# Altium PCB PA-03225-V0.4-4.PcbDoc (part 2 of 4)
Units mm, origin at the board's own origin, x right, y up, seen from the top; angles counter-clockwise.
Board outline 43 x 41 mm, 6 copper layers (Top Layer, GND, L3, L4, PWR, Bottom Layer); 103 components, 178 nets, 551 pads, 290 vias.
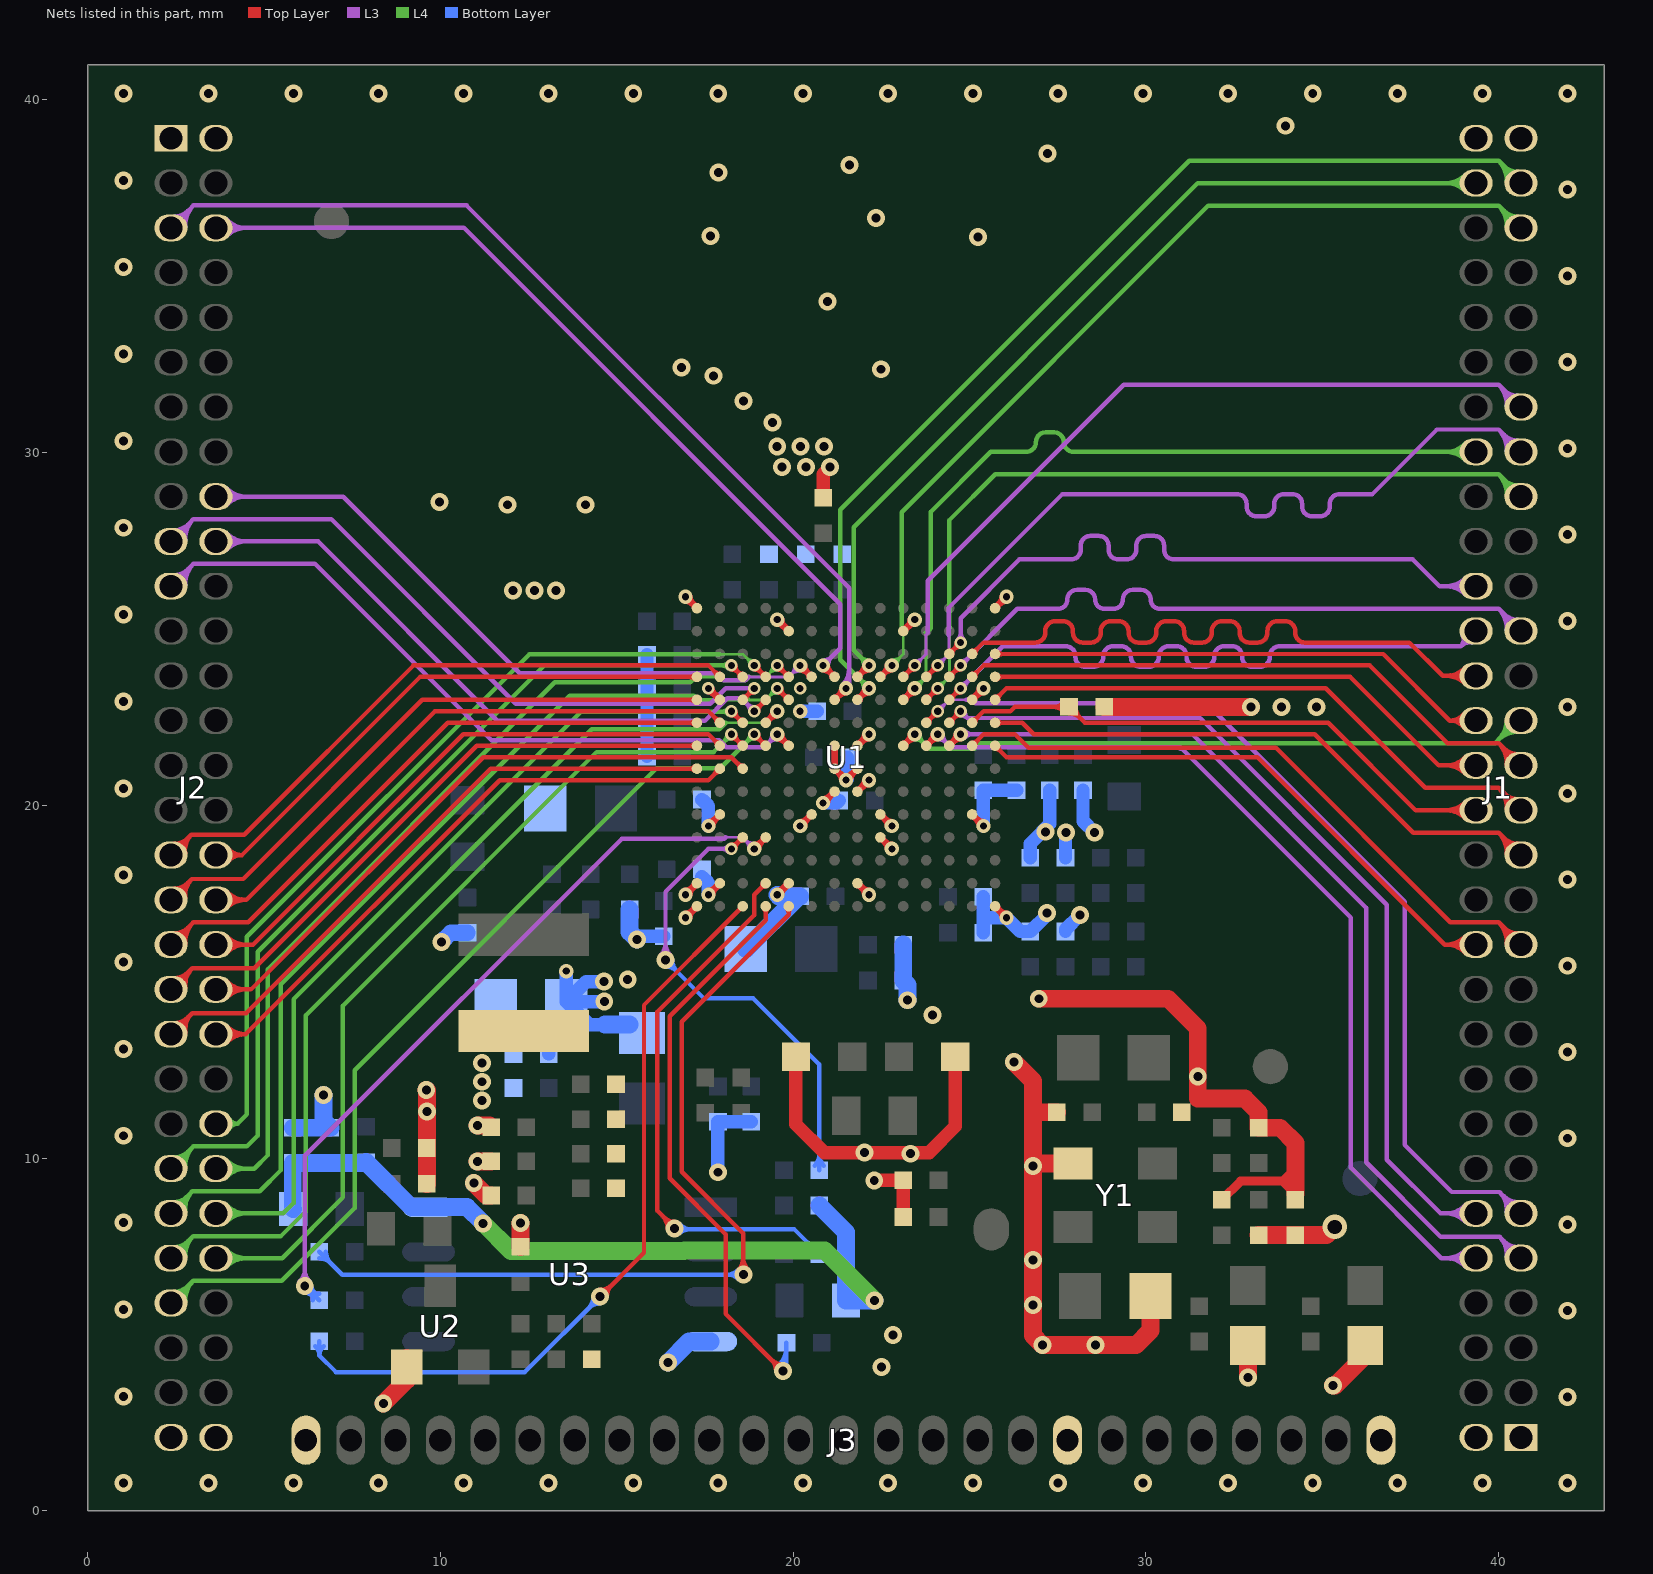
[diagram p6: the nets of this part, all layers, seen from the top]

## Via types
v1: diameter 0.508, hole 0.254, Top Layer to Bottom Layer, tented both sides, 169 vias
v2: diameter 0.406, hole 0.203, Top Layer to Bottom Layer, tented both sides, 78 vias
v3: diameter 0.356, hole 0.203, Top Layer to Bottom Layer, tented both sides, 42 vias
v4: diameter 0.7, hole 0.4, Top Layer to Bottom Layer, tented both sides, 1 vias

## Nets (pads, with @x,y where several pads share a name; then routed paths per layer and width w, separated by ;. In a path a pad name is that pad's centre, name@x,y a point inside that pad or via, vN(x,y) a via of type N, cw(c..) or ccw(c..) an arc to the next point about the centre after c; other vN are vias at no path point) (continued)
C12_RMII1-CRS_DV: J1.40 U1.C12 | length 21.6
  Top Layer w0.127: U1.C12@24.425,24.294 v3(24.75,24.619) ; U1.C12@24.425,24.38 ccw(c24.425,24.589) 24.573,24.441 ccw(c24.72,24.294) U1.C12@24.512,24.294 ; v3@24.636,24.619 cw(c24.36,24.619) 24.555,24.423 cw(c24.75,24.228) v3@24.75,24.504
  L3 w0.127: v3@24.669,24.699 ccw(c24.474,24.895) 24.75,24.895 ccw(c25.026,24.895) v3@24.831,24.699 ; v3(24.75,24.619) 24.75,25.309 26.416,26.975 27.88,26.975 ccw(c27.88,27.25) 28.156,27.25 28.156,27.366 cw(c28.431,27.366) 28.431,27.642 28.668,27.642 cw(c28.668,27.366) 28.943,27.366 28.943,27.25 ccw(c29.219,27.25) 29.219,26.975 29.455,26.975 ccw(c29.455,27.25) 29.731,27.25 29.731,27.366 cw(c30.006,27.366) 30.006,27.642 30.243,27.642 cw(c30.243,27.366) 30.518,27.366 30.518,27.25 ccw(c30.794,27.25) 30.794,26.975 37.567,26.975 38.326,26.215 J1.40@39.365,26.215 ; J1.40@39.052,25.99 ccw(c38.51,25.448) 38.51,26.215 ccw(c38.51,26.982) J1.40@39.052,26.44 ; J1.40@39.141,26.08 ccw(c38.816,25.755) 38.816,26.215 ccw(c38.816,26.675) J1.40@39.141,26.35
C13_ENET1_RXER: J1.36 U1.C13 | length 20.7
  Top Layer w0.127: U1.C13@25.075,24.294 25.4,24.619 26.754,24.619 26.872,24.619 ccw(c26.872,24.894) 27.147,24.894 27.147,24.947 cw(c27.423,24.947) 27.423,25.223 27.659,25.223 cw(c27.659,24.947) 27.935,24.947 27.935,24.894 ccw(c28.21,24.894) 28.21,24.619 28.447,24.619 ccw(c28.447,24.894) 28.722,24.894 28.722,24.947 cw(c28.998,24.947) 28.998,25.223 29.234,25.223 cw(c29.234,24.947) 29.51,24.947 29.51,24.894 ccw(c29.785,24.894) 29.785,24.619 30.021,24.619 ccw(c30.021,24.894) 30.297,24.894 30.297,24.947 cw(c30.572,24.947) 30.572,25.223 30.809,25.223 cw(c30.809,24.947) 31.084,24.947 31.084,24.894 ccw(c31.36,24.894) 31.36,24.619 31.596,24.619 ccw(c31.596,24.894) 31.872,24.894 31.872,24.947 cw(c32.147,24.947) 32.147,25.223 32.384,25.223 cw(c32.384,24.947) 32.659,24.947 32.659,24.894 ccw(c32.935,24.894) 32.935,24.619 33.171,24.619 ccw(c33.171,24.894) 33.447,24.894 33.447,24.947 cw(c33.722,24.947) 33.722,25.223 33.958,25.223 cw(c33.958,24.947) 34.234,24.947 34.234,24.894 ccw(c34.509,24.894) 34.509,24.619 36.703,24.619 37.471,24.619 38.415,23.675 J1.36@39.365,23.675 ; U1.C13@25.075,24.38 ccw(c25.075,24.589) 25.223,24.441 ccw(c25.37,24.294) U1.C13@25.162,24.294 ; J1.36@39.052,23.45 ccw(c38.51,22.908) 38.51,23.675 ccw(c38.51,24.442) J1.36@39.052,23.9 ; J1.36@39.141,23.54 ccw(c38.816,23.215) 38.816,23.675 ccw(c38.816,24.135) J1.36@39.141,23.81
C14_ETH1-MDC: J1.34 U1.C14 | length 16.3
  Top Layer w0.127: U1.C14@25.725,24.294 36.729,24.294 38.618,22.405 ; U1.C14@25.786,24.232 cw(c25.934,24.085) 25.934,24.294 cw(c25.934,24.502) U1.C14@25.786,24.355 ; J1.34@39.028,22.207 ccw(c38.618,21.881) 38.618,22.405 ; J1.34@39.028,22.603 cw(c38.618,22.929) 38.618,22.405 ; J1.34@39.127,22.286 ccw(c38.881,22.091) 38.881,22.405 ccw(c38.881,22.719) J1.34@39.127,22.524 ; J1.34@39.365,22.405 38.618,22.405
D1: J2.34 U1.D1 | length 17.5
  Top Layer w0.127: J2.34@3.635,18.595 4.377,18.595 ; J2.34@3.874,18.477 cw(c4.116,18.287) 4.116,18.595 cw(c4.116,18.902) J2.34@3.874,18.712 ; J2.34@3.974,18.399 cw(c4.377,18.083) 4.377,18.595 ; J2.34@3.974,18.791 ccw(c4.377,19.107) 4.377,18.595 ; U1.D1@17.214,23.582 ccw(c17.066,23.435) 17.066,23.644 ccw(c17.066,23.852) U1.D1@17.214,23.705 ; U1.D1@17.275,23.644 9.426,23.644 4.377,18.595
D2: J2.33 U1.D2 | length 19.7
  Top Layer w0.127: J2.33@2.365,18.595 2.941,19.171 ; J2.33@2.454,18.912 ccw(c2.454,19.464) 2.844,19.074 ; J2.33@2.642,18.623 cw(c3.069,18.688) 2.764,18.993 ; J2.33@2.768,18.642 cw(c3.377,18.735) 2.941,19.171 ; U1.D2@17.839,23.644 ccw(c17.63,23.644) 17.777,23.791 ccw(c17.925,23.939) U1.D2@17.925,23.73 ; U1.D2@17.925,23.644 17.6,23.969 9.237,23.969 4.439,19.171 2.941,19.171
D3: J2.47 U1.D3 | length 28.1
  Top Layer w0.127: v3@18.25,23.854 cw(c18.25,23.578) 18.445,23.773 cw(c18.64,23.969) v3@18.364,23.969 ; v3(18.25,23.969) U1.D3@18.575,23.644 ; U1.D3@18.489,23.644 ccw(c18.28,23.644) 18.427,23.791 ccw(c18.575,23.939) U1.D3@18.575,23.73
  L4 w0.127: J2.47@2.365,9.705 2.992,10.332 ; J2.47@2.454,10.022 ccw(c2.454,10.574) 2.844,10.184 ; J2.47@2.644,9.72 cw(c3.173,9.762) 2.798,10.137 ; J2.47@2.77,9.73 cw(c3.533,9.791) 2.992,10.332 ; v3@18.169,23.888 ccw(c17.974,23.693) 17.974,23.969 ccw(c17.974,24.245) v3@18.169,24.049 ; v3(18.25,23.969) 12.942,23.969 4.826,15.853 4.826,10.642 4.516,10.332 2.992,10.332
D4: J2.46 U1.D4 | length 26.2
  Top Layer w0.127: v3@18.9,23.854 cw(c18.9,23.578) 19.095,23.773 cw(c19.29,23.969) v3@19.014,23.969 ; v3(18.9,23.969) U1.D4@19.225,23.644 ; U1.D4@19.139,23.644 ccw(c18.93,23.644) 19.077,23.791 ccw(c19.225,23.939) U1.D4@19.225,23.73
  L4 w0.076: 17.907,24.286 18.582,24.286 v3(18.9,23.969) ; v3@18.76,23.969 ccw(c18.423,23.969) 18.662,24.207 ccw(c18.9,24.446) v3@18.9,24.108
  L4 w0.127: J2.46@3.635,10.975 4.25,10.975 ; J2.46@4.005,10.827 cw(c4.25,10.698) 4.25,10.975 ; J2.46@4.005,11.122 ccw(c4.25,11.251) 4.25,10.975 ; 17.907,24.286 12.525,24.286 4.516,16.277 4.516,11.241 4.25,10.975
D5: J2.48 U1.D5 | length 28.7
  Top Layer w0.127: v3@19.55,23.854 cw(c19.55,23.578) 19.745,23.773 cw(c19.94,23.969) v3@19.664,23.969 ; v3(19.55,23.969) U1.D5@19.875,23.644 ; U1.D5@19.789,23.644 ccw(c19.58,23.644) 19.727,23.791 ccw(c19.875,23.939) U1.D5@19.875,23.73
  L4 w0.076: 18.74,23.651 19.232,23.651 v3(19.55,23.969) ; v3@19.41,23.969 cw(c19.073,23.969) 19.312,23.73 cw(c19.55,23.492) v3@19.55,23.829
  L4 w0.127: J2.48@3.635,9.705 4.726,9.705 5.111,10.09 5.111,15.359 13.247,23.495 17.08,23.495 17.247,23.662 17.926,23.662 18.034,23.554 18.65,23.554 18.74,23.644 ; J2.48@3.859,9.57 cw(c4.184,9.245) 4.184,9.705 cw(c4.184,10.165) J2.48@3.859,9.839 ; J2.48@3.948,9.48 cw(c4.49,8.938) 4.49,9.705 cw(c4.49,10.471) J2.48@3.948,9.929
D6_SAI3_TX_BLCK: J2.18 U1.D6 | length 24.1
  Top Layer w0.127: v2@20.189,23.829 cw(c20.164,23.5) U1.D6@20.45,23.665 ; v2@20.2,23.829 cw(c20.2,23.492) 20.438,23.73 cw(c20.677,23.969) v2@20.34,23.969 ; v2(20.2,23.969) U1.D6@20.525,23.644 ; v2@20.23,23.832 cw(c20.263,23.682) 20.396,23.759 ; v2@20.336,23.939 ccw(c20.487,23.906) 20.41,23.773 ; v2@20.339,23.979 ccw(c20.668,24.004) U1.D6@20.503,23.718 ; U1.D6@20.439,23.644 ccw(c20.23,23.644) 20.377,23.791 ccw(c20.525,23.939) U1.D6@20.525,23.73
  L3 w0.076: 18.74,23.644 19.875,23.644 v2(20.2,23.969) ; v2@20.035,23.969 cw(c19.636,23.969) 19.918,23.687 cw(c20.2,23.405) v2@20.2,23.804 ; v2@20.111,23.969 cw(c19.896,23.969) 20.048,23.817 cw(c20.2,23.665) v2@20.2,23.88
  L3 w0.127: J2.18@3.635,28.755 7.243,28.755 12.249,23.749 17.82,23.749 18.015,23.554 18.65,23.554 18.74,23.644 ; J2.18@3.859,28.62 cw(c4.184,28.295) 4.184,28.755 cw(c4.184,29.215) J2.18@3.859,28.889 ; J2.18@3.948,28.53 cw(c4.49,27.988) 4.49,28.755 cw(c4.49,29.521) J2.18@3.948,28.979
D7_ETH2-MDC: J2.6 U1.D7 | length 28.9
  Top Layer w0.127: v2@20.839,23.829 cw(c20.814,23.5) U1.D7@21.1,23.665 ; v2@20.85,23.829 cw(c20.85,23.492) 21.088,23.73 cw(c21.327,23.969) v2@20.99,23.969 ; v2(20.85,23.969) U1.D7@21.175,23.644 ; v2@20.88,23.832 cw(c20.913,23.682) 21.046,23.759 ; v2@20.986,23.939 ccw(c21.137,23.906) 21.06,23.773 ; v2@20.989,23.979 ccw(c21.318,24.004) U1.D7@21.153,23.718 ; U1.D7@21.089,23.644 ccw(c20.88,23.644) 21.027,23.791 ccw(c21.175,23.939) U1.D7@21.175,23.73
  L3 w0.127: J2.6@3.635,36.375 10.668,36.375 21.336,25.707 21.336,24.455 v2(20.85,23.969) ; J2.6@3.859,36.24 cw(c4.184,35.915) 4.184,36.375 cw(c4.184,36.835) J2.6@3.859,36.509 ; J2.6@3.948,36.15 cw(c4.49,35.608) 4.49,36.375 cw(c4.49,37.141) J2.6@3.948,36.599 ; v2@20.85,24.108 ccw(c20.85,24.446) 21.088,24.207 ccw(c21.327,23.969) v2@20.99,23.969
D8: J1.58 U1.D8 | length 30.6
  Top Layer w0.127: U1.D8@21.825,23.644 v2(22.15,23.969) ; U1.D8@21.825,23.73 ccw(c21.825,23.939) 21.973,23.791 ccw(c22.12,23.644) U1.D8@21.912,23.644 ; U1.D8@21.847,23.718 ccw(c21.682,24.004) v2@22.011,23.979 ; U1.D8@21.9,23.665 cw(c22.186,23.5) v2@22.161,23.829 ; 21.94,23.773 ccw(c21.863,23.906) v2@22.014,23.939 ; 21.954,23.759 cw(c22.087,23.682) v2@22.12,23.832 ; v2@22.01,23.969 cw(c21.673,23.969) 21.912,23.73 cw(c22.15,23.492) v2@22.15,23.829
  L4 w0.127: v2@22.01,23.969 ccw(c21.673,23.969) 21.912,24.207 ccw(c22.15,24.446) v2@22.15,24.108 ; v2(22.15,23.969) 21.717,24.402 21.717,27.889 31.473,37.645 J1.58@39.365,37.645 ; J1.58@39.052,37.42 ccw(c38.51,36.878) 38.51,37.645 ccw(c38.51,38.412) J1.58@39.052,37.87 ; J1.58@39.141,37.51 ccw(c38.816,37.185) 38.816,37.645 ccw(c38.816,38.105) J1.58@39.141,37.78
D9: J1.55 U1.D9 | length 30.8
  Top Layer w0.127: U1.D9@22.475,23.644 v2(22.8,23.969) ; U1.D9@22.475,23.73 ccw(c22.475,23.939) 22.623,23.791 ccw(c22.77,23.644) U1.D9@22.562,23.644 ; U1.D9@22.497,23.718 ccw(c22.332,24.004) v2@22.661,23.979 ; U1.D9@22.55,23.665 cw(c22.836,23.5) v2@22.811,23.829 ; 22.59,23.773 ccw(c22.513,23.906) v2@22.664,23.939 ; 22.604,23.759 cw(c22.737,23.682) v2@22.77,23.832 ; v2@22.66,23.969 cw(c22.323,23.969) 22.562,23.73 cw(c22.8,23.492) v2@22.8,23.829
  L4 w0.076: v2(22.8,23.969) 23.125,24.294 23.125,24.944 23.082,24.987 ; v2@22.8,24.058 ccw(c22.8,24.272) 22.952,24.12 ccw(c23.104,23.969) v2@22.889,23.969 ; v2@22.8,24.134 ccw(c22.8,24.532) 23.082,24.25 ccw(c23.364,23.969) v2@22.965,23.969
  L4 w0.127: 23.082,24.987 23.082,28.316 31.773,37.008 40.002,37.008 ; 40.156,36.854 ccw(c40.546,37.244) J1.55@40.546,36.693 ; 40.199,36.811 cw(c39.815,36.428) J1.55@40.356,36.389 ; J1.55@40.229,36.398 ccw(c39.449,36.454) 40.002,37.008 ; J1.55@40.635,36.375 40.002,37.008
D10_RMII2-TXD1: J1.47 U1.D10 | length 25.3
  Top Layer w0.127: U1.D10@23.125,23.644 v3(23.45,23.969) ; U1.D10@23.125,23.73 ccw(c23.125,23.939) 23.273,23.791 ccw(c23.42,23.644) U1.D10@23.212,23.644 ; v3@23.336,23.969 cw(c23.06,23.969) 23.255,23.773 cw(c23.45,23.578) v3@23.45,23.854
  L3 w0.076: v3(23.45,23.969) 23.768,24.286 23.768,24.841 23.818,24.892 ; v3@23.45,24.108 ccw(c23.45,24.446) 23.689,24.207 ccw(c23.927,23.969) v3@23.59,23.969
  L3 w0.127: 23.818,24.892 23.818,26.373 29.373,31.928 40.002,31.928 ; 40.156,31.774 ccw(c40.546,32.164) J1.47@40.546,31.613 ; 40.199,31.731 cw(c39.815,31.348) J1.47@40.356,31.309 ; J1.47@40.229,31.318 ccw(c39.449,31.374) 40.002,31.928 ; J1.47@40.635,31.295 40.002,31.928
D11_RMII2-CRS_DV: J1.45 U1.D11 | length 25.2
  Top Layer w0.127: U1.D11@23.775,23.644 v3(24.1,23.969) ; U1.D11@23.775,23.73 ccw(c23.775,23.939) 23.923,23.791 ccw(c24.07,23.644) U1.D11@23.862,23.644 ; v3@23.986,23.969 cw(c23.71,23.969) 23.905,23.773 cw(c24.1,23.578) v3@24.1,23.854
  L3 w0.076: v3(24.1,23.969) 24.418,24.286 24.418,24.822 ; v3@24.1,24.108 ccw(c24.1,24.446) 24.339,24.207 ccw(c24.577,23.969) v3@24.24,23.969
  L3 w0.127: 24.418,24.822 24.418,25.611 27.635,28.829 32.579,28.829 cw(c32.579,28.553) 32.855,28.553 32.855,28.475 ccw(c33.13,28.475) 33.13,28.199 33.367,28.199 ccw(c33.367,28.475) 33.642,28.475 33.642,28.553 cw(c33.918,28.553) 33.918,28.829 34.154,28.829 cw(c34.154,28.553) 34.43,28.553 34.43,28.475 ccw(c34.705,28.475) 34.705,28.199 34.942,28.199 ccw(c34.942,28.475) 35.217,28.475 35.217,28.553 cw(c35.493,28.553) 35.493,28.829 36.424,28.829 38.252,30.658 40.002,30.658 ; 40.156,30.504 ccw(c40.546,30.894) J1.45@40.546,30.343 ; 40.199,30.461 cw(c39.815,30.078) J1.45@40.356,30.039 ; J1.45@40.229,30.048 ccw(c39.449,30.104) 40.002,30.658 ; J1.45@40.635,30.025 40.002,30.658
D12_RMII1-RXD1: J1.37 U1.D12 | length 21.3
  Top Layer w0.127: U1.D12@24.425,23.644 v3(24.75,23.969) ; U1.D12@24.425,23.73 ccw(c24.425,23.939) 24.573,23.791 ccw(c24.72,23.644) U1.D12@24.512,23.644 ; v3@24.636,23.969 cw(c24.36,23.969) 24.555,23.773 cw(c24.75,23.578) v3@24.75,23.854
  L3 w0.127: v3(24.75,23.969) 26.359,25.578 27.517,25.578 ccw(c27.517,25.836) 27.775,25.836 cw(c28.05,25.836) 28.05,26.111 28.287,26.111 cw(c28.287,25.836) 28.562,25.836 ccw(c28.82,25.836) 28.82,25.578 29.092,25.578 ccw(c29.092,25.836) 29.35,25.836 cw(c29.625,25.836) 29.625,26.111 29.862,26.111 cw(c29.862,25.836) 30.137,25.836 ccw(c30.395,25.836) 30.395,25.578 40.002,25.578 ; v3@24.75,24.083 ccw(c24.75,24.359) 24.945,24.164 ccw(c25.14,23.969) v3@24.864,23.969 ; 40.156,25.424 ccw(c40.546,25.814) J1.37@40.546,25.263 ; 40.199,25.381 cw(c39.815,24.998) J1.37@40.356,24.959 ; J1.37@40.229,24.968 ccw(c39.449,25.024) 40.002,25.578 ; J1.37@40.635,24.945 40.002,25.578
D13: J1.31 U1.D13 | length 18.8
  Top Layer w0.127: U1.D13@25.075,23.644 25.4,23.969 36.347,23.969 38.548,21.768 40.002,21.768 ; U1.D13@25.075,23.73 ccw(c25.075,23.939) 25.223,23.791 ccw(c25.37,23.644) U1.D13@25.162,23.644 ; 40.156,21.614 ccw(c40.546,22.004) J1.31@40.546,21.453 ; 40.199,21.571 cw(c39.815,21.188) J1.31@40.356,21.149 ; J1.31@40.229,21.158 ccw(c39.449,21.214) 40.002,21.768 ; J1.31@40.635,21.135 40.002,21.768
D14: J1.32 U1.D14 | length 16.9
  Top Layer w0.127: U1.D14@25.725,23.644 35.792,23.644 38.301,21.135 J1.32@39.365,21.135 ; U1.D14@25.786,23.582 cw(c25.934,23.435) 25.934,23.644 cw(c25.934,23.852) U1.D14@25.786,23.705 ; J1.32@39.052,20.91 ccw(c38.51,20.368) 38.51,21.135 ccw(c38.51,21.902) J1.32@39.052,21.36 ; J1.32@39.141,21 ccw(c38.816,20.675) 38.816,21.135 ccw(c38.816,21.595) J1.32@39.141,21.27
DCDC_3V3: C60.1 R8.2 R11.1 R37.2 | length 4.9
  Top Layer w0.508: v1(9.601,11.938) 9.619,11.921 R8.2@9.619,10.287 R11.1@9.619,9.271 ; R37.2@33.198,7.817 C60.1@34.239,7.817 35.122,7.817 v4(35.357,8.052)
  other v1: 9.619,11.328
DCDC_OUT: C29.2 C30.1 L1.2 R2.2
  other v1: 11.176,11.633 11.176,12.167 11.176,12.7
E1: J2.35 U1.E1 | length 19
  Top Layer w0.127: J2.35@2.365,17.325 2.955,17.915 ; J2.35@2.454,17.642 ccw(c2.454,18.194) 2.844,17.804 ; J2.35@2.643,17.349 cw(c3.096,17.409) 2.773,17.732 ; J2.35@2.769,17.366 cw(c3.418,17.451) 2.955,17.915 ; U1.E1@17.214,22.932 ccw(c17.066,22.785) 17.066,22.994 ccw(c17.066,23.202) U1.E1@17.214,23.055 ; U1.E1@17.275,22.994 9.487,22.994 4.408,17.915 2.955,17.915
E3: J2.19 U1.E3 | length 21.9
  Top Layer w0.127: U1.E3@18.575,22.994 v3(18.9,23.319) ; U1.E3@18.575,23.08 ccw(c18.575,23.289) 18.723,23.141 ccw(c18.87,22.994) U1.E3@18.662,22.994 ; v3@18.786,23.319 cw(c18.51,23.319) 18.705,23.123 cw(c18.9,22.928) v3@18.9,23.204
  L3 w0.127: J2.19@2.365,27.485 3,28.12 ; J2.19@2.454,27.802 ccw(c2.454,28.354) 2.844,27.964 ; J2.19@2.644,27.498 cw(c3.19,27.536) 2.803,27.922 ; J2.19@2.771,27.507 cw(c3.558,27.561) 3,28.12 ; v3(18.9,23.319) 18.09,23.319 17.655,22.884 12.139,22.884 6.903,28.12 3,28.12
E4_SAI3_MCLK: J2.20 U1.E4 | length 21.4
  Top Layer w0.127: v3(18.9,22.669) U1.E4@19.225,22.994 ; v3@18.9,22.783 ccw(c18.9,23.059) 19.095,22.864 ccw(c19.29,22.669) v3@19.014,22.669 ; U1.E4@19.139,22.994 cw(c18.93,22.994) 19.077,22.846 cw(c19.225,22.698) U1.E4@19.225,22.907
  L3 w0.127: J2.20@3.635,27.485 6.534,27.485 11.614,22.405 17.501,22.405 18.133,23.037 18.532,23.037 v3(18.9,22.669) ; J2.20@3.859,27.35 cw(c4.184,27.025) 4.184,27.485 cw(c4.184,27.945) J2.20@3.859,27.619 ; J2.20@3.948,27.26 cw(c4.49,26.718) 4.49,27.485 cw(c4.49,28.251) J2.20@3.948,27.709 ; v3@18.786,22.669 ccw(c18.51,22.669) 18.705,22.864 ccw(c18.9,23.059) v3@18.9,22.783
E5: J2.49 U1.E5 | length 29.9
  Top Layer w0.127: v3@19.55,23.204 cw(c19.55,22.928) 19.745,23.123 cw(c19.94,23.319) v3@19.664,23.319 ; v3(19.55,23.319) U1.E5@19.875,22.994 ; U1.E5@19.789,22.994 ccw(c19.58,22.994) 19.727,23.141 ccw(c19.875,23.289) U1.E5@19.875,23.08
  L4 w0.076: 18.722,23.012 18.747,22.987 19.218,22.987 v3(19.55,23.319) ; v3@19.41,23.319 cw(c19.073,23.319) 19.312,23.08 cw(c19.55,22.842) v3@19.55,23.179
  L4 w0.127: J2.49@2.286,8.376 J2.49@2.345,8.435 ; J2.49@2.365,8.435 J2.49@2.345,8.435 ; J2.49@2.454,8.752 ccw(c2.454,9.255) 2.809,8.899 ; J2.49@2.643,8.458 cw(c3.146,8.519) 2.788,8.878 ; J2.49@2.769,8.473 cw(c3.474,8.56) 2.972,9.062 ; 18.722,23.012 17.943,23.012 17.907,22.976 17.323,22.976 17.185,23.114 13.668,23.114 5.48,14.927 5.48,9.663 4.879,9.062 2.972,9.062 ; J2.49@2.345,8.435 2.972,9.062
E7_ETH2-MDIO: J2.5 U1.E7 | length 31.6
  Top Layer w0.127: U1.E7@21.175,22.994 v2(21.5,23.319) ; U1.E7@21.175,23.08 ccw(c21.175,23.289) 21.323,23.141 ccw(c21.47,22.994) U1.E7@21.262,22.994 ; U1.E7@21.197,23.068 ccw(c21.032,23.354) v2@21.361,23.329 ; U1.E7@21.25,23.015 cw(c21.536,22.85) v2@21.511,23.179 ; 21.29,23.123 ccw(c21.213,23.256) v2@21.364,23.289 ; 21.304,23.109 cw(c21.437,23.032) v2@21.47,23.182 ; v2@21.36,23.319 cw(c21.023,23.319) 21.262,23.08 cw(c21.5,22.842) v2@21.5,23.179
  L3 w0.127: J2.5@2.365,36.375 3,37.01 ; J2.5@2.454,36.692 ccw(c2.454,37.244) 2.844,36.854 ; J2.5@2.644,36.388 cw(c3.19,36.426) 2.803,36.812 ; J2.5@2.771,36.397 cw(c3.558,36.451) 3,37.01 ; v2@21.401,23.417 ccw(c20.946,23.873) 21.59,23.873 ; v2@21.491,23.328 ccw(c21.252,23.567) 21.59,23.567 ; v2(21.5,23.319) 21.59,23.409 21.59,26.162 10.742,37.01 3,37.01
E8: J1.57 U1.E8 | length 33.5
  Top Layer w0.127: U1.E8@21.825,22.994 v2(22.15,23.319) ; U1.E8@21.825,23.08 ccw(c21.825,23.289) 21.973,23.141 ccw(c22.12,22.994) U1.E8@21.912,22.994 ; U1.E8@21.847,23.068 ccw(c21.682,23.354) v2@22.011,23.329 ; U1.E8@21.9,23.015 cw(c22.186,22.85) v2@22.161,23.179 ; 21.94,23.123 ccw(c21.863,23.256) v2@22.014,23.289 ; 21.954,23.109 cw(c22.087,23.032) v2@22.12,23.182 ; v2@22.01,23.319 cw(c21.673,23.319) 21.912,23.08 cw(c22.15,22.842) v2@22.15,23.179
  L4 w0.127: v2@22.01,23.319 ccw(c21.673,23.319) 21.912,23.557 ccw(c22.15,23.796) v2@22.15,23.458 ; v2(22.15,23.319) 21.336,24.133 21.336,28.381 31.233,38.278 40.002,38.278 ; 40.156,38.124 ccw(c40.546,38.514) J1.57@40.546,37.963 ; 40.199,38.081 cw(c39.815,37.698) J1.57@40.356,37.659 ; J1.57@40.229,37.668 ccw(c39.449,37.724) 40.002,38.278 ; J1.57@40.635,37.645 40.002,38.278
E10_RMII2-TX_EN: J1.46 U1.E10 | length 27.2
  Top Layer w0.127: U1.E10@23.125,22.994 v2(23.45,23.319) ; U1.E10@23.125,23.08 ccw(c23.125,23.289) 23.273,23.141 ccw(c23.42,22.994) U1.E10@23.212,22.994 ; U1.E10@23.147,23.068 ccw(c22.982,23.354) v2@23.311,23.329 ; U1.E10@23.2,23.015 cw(c23.486,22.85) v2@23.461,23.179 ; 23.24,23.123 ccw(c23.163,23.256) v2@23.314,23.289 ; 23.254,23.109 cw(c23.387,23.032) v2@23.42,23.182 ; v2@23.31,23.319 cw(c22.973,23.319) 23.212,23.08 cw(c23.45,22.842) v2@23.45,23.179
  L4 w0.076: v2(23.45,23.319) 23.768,23.636 23.768,24.892 ; v2@23.45,23.408 ccw(c23.45,23.622) 23.602,23.47 ccw(c23.754,23.319) v2@23.539,23.319 ; v2@23.45,23.484 ccw(c23.45,23.882) 23.732,23.6 ccw(c24.014,23.319) v2@23.615,23.319
  L4 w0.127: 23.768,24.892 23.901,25.026 23.901,28.321 25.605,30.025 26.61,30.025 ccw(c26.61,30.301) 26.886,30.301 cw(c27.161,30.301) 27.161,30.576 27.398,30.576 cw(c27.398,30.301) 27.673,30.301 ccw(c27.949,30.301) 27.949,30.025 J1.46@39.365,30.025 ; J1.46@39.052,29.8 ccw(c38.51,29.258) 38.51,30.025 ccw(c38.51,30.792) J1.46@39.052,30.25 ; J1.46@39.141,29.89 ccw(c38.816,29.565) 38.816,30.025 ccw(c38.816,30.485) J1.46@39.141,30.16
E11_RMII2-REF_CLK: J1.43 U1.E11 | length 25.2
  Top Layer w0.127: U1.E11@23.775,22.994 v3(24.1,23.319) ; U1.E11@23.775,23.08 ccw(c23.775,23.289) 23.923,23.141 ccw(c24.07,22.994) U1.E11@23.862,22.994 ; v3@23.986,23.319 cw(c23.71,23.319) 23.905,23.123 cw(c24.1,22.928) v3@24.1,23.204
  L4 w0.076: v3(24.1,23.319) 24.433,23.651 24.433,25.019 ; v3@24.1,23.458 ccw(c24.1,23.796) 24.339,23.557 ccw(c24.577,23.319) v3@24.24,23.319
  L4 w0.127: 24.433,25.019 24.433,28.09 25.73,29.388 40.002,29.388 ; 40.156,29.234 ccw(c40.546,29.624) J1.43@40.546,29.073 ; 40.199,29.191 cw(c39.815,28.808) J1.43@40.356,28.769 ; J1.43@40.229,28.778 ccw(c39.449,28.834) 40.002,29.388 ; J1.43@40.635,28.755 40.002,29.388
E12_RMII1-RXD0: J1.38 U1.E12 | length 20.4
  Top Layer w0.127: U1.E12@24.425,22.994 v3(24.75,23.319) ; U1.E12@24.425,23.08 ccw(c24.425,23.289) 24.573,23.141 ccw(c24.72,22.994) U1.E12@24.512,22.994 ; v3@24.636,23.319 cw(c24.36,23.319) 24.555,23.123 cw(c24.75,22.928) v3@24.75,23.204
  L3 w0.127: v3(24.75,23.319) 25.942,24.511 27.728,24.511 cw(c27.728,24.235) 28.003,24.235 28.003,24.207 ccw(c28.279,24.207) 28.279,23.932 28.515,23.932 ccw(c28.515,24.207) 28.791,24.207 28.791,24.235 cw(c29.066,24.235) 29.066,24.511 29.303,24.511 cw(c29.303,24.235) 29.578,24.235 29.578,24.207 ccw(c29.854,24.207) 29.854,23.932 30.09,23.932 ccw(c30.09,24.207) 30.366,24.207 30.366,24.235 cw(c30.641,24.235) 30.641,24.511 30.878,24.511 cw(c30.878,24.235) 31.153,24.235 31.153,24.207 ccw(c31.429,24.207) 31.429,23.932 31.665,23.932 ccw(c31.665,24.207) 31.94,24.207 31.941,24.235 cw(c32.216,24.235) 32.216,24.511 32.452,24.511 cw(c32.452,24.235) 32.728,24.235 32.728,24.207 ccw(c33.003,24.207) 33.003,23.932 33.24,23.932 ccw(c33.24,24.207) 33.515,24.207 33.515,24.235 cw(c33.791,24.235) 33.791,24.511 38.931,24.511 ; v3@24.75,23.433 ccw(c24.75,23.709) 24.945,23.514 ccw(c25.14,23.319) v3@24.864,23.319 ; J1.38@38.987,24.815 cw(c38.739,24.703) 38.931,24.511 ; J1.38@39.251,24.629 ccw(c39.218,24.224) 38.931,24.511 ; J1.38@39.365,24.945 38.931,24.511
E14_SWD_DIO: J1.29 U1.E14 | length 18.4
  Top Layer w0.127: U1.E14@25.725,22.994 26.05,23.319 35.101,23.319 37.922,20.498 40.002,20.498 ; U1.E14@25.725,23.08 ccw(c25.725,23.289) 25.873,23.141 ccw(c26.02,22.994) U1.E14@25.812,22.994 ; 40.156,20.344 ccw(c40.546,20.734) J1.29@40.546,20.183 ; 40.199,20.301 cw(c39.815,19.918) J1.29@40.356,19.879 ; J1.29@40.229,19.888 ccw(c39.449,19.944) 40.002,20.498 ; J1.29@40.635,19.865 40.002,20.498
F1: J2.37 U1.F1 | length 19.4
  Top Layer w0.127: J2.37@2.365,16.055 3,16.69 ; J2.37@2.454,16.372 ccw(c2.454,16.924) 2.844,16.534 ; J2.37@2.644,16.068 cw(c3.19,16.106) 2.803,16.492 ; J2.37@2.771,16.077 cw(c3.558,16.131) 3,16.69 ; U1.F1@17.214,22.282 ccw(c17.066,22.135) 17.066,22.344 ccw(c17.066,22.552) U1.F1@17.214,22.405 ; U1.F1@17.275,22.344 10.208,22.344 4.554,16.69 3,16.69
F2_SAI2_TX_DATA: J2.36 U1.F2 | length 18.9
  Top Layer w0.127: J2.36@3.635,17.325 4.504,17.325 9.848,22.669 17.6,22.669 U1.F2@17.925,22.344 ; J2.36@3.859,17.19 cw(c4.184,16.865) 4.184,17.325 cw(c4.184,17.785) J2.36@3.859,17.459 ; J2.36@3.948,17.1 cw(c4.49,16.558) 4.49,17.325 cw(c4.49,18.091) J2.36@3.948,17.549 ; U1.F2@17.839,22.344 ccw(c17.63,22.344) 17.777,22.491 ccw(c17.925,22.639) U1.F2@17.925,22.43
F3: J2.50 U1.F3 | length 27.5
  Top Layer w0.127: v3@18.25,22.554 cw(c18.25,22.278) 18.445,22.473 cw(c18.64,22.669) v3@18.364,22.669 ; v3(18.25,22.669) U1.F3@18.575,22.344 ; U1.F3@18.489,22.344 ccw(c18.28,22.344) 18.427,22.491 ccw(c18.575,22.639) U1.F3@18.575,22.43
  L4 w0.127: J2.50@3.635,8.435 5.547,8.435 5.838,8.726 5.838,14.505 13.988,22.655 18.237,22.655 v3(18.25,22.669) ; J2.50@3.859,8.3 cw(c4.184,7.975) 4.184,8.435 cw(c4.184,8.895) J2.50@3.859,8.569 ; J2.50@3.948,8.21 cw(c4.49,7.668) 4.49,8.435 cw(c4.49,9.201) J2.50@3.948,8.659 ; 17.942,22.655 ccw(c17.942,22.976) v3@18.169,22.749 ; 18.006,22.655 cw(c18.006,22.425) v3@18.169,22.588
F4: J2.51 U1.F4 | length 31.7
  Top Layer w0.127: U1.F4@19.225,22.344 v2(19.55,22.669) ; U1.F4@19.225,22.43 ccw(c19.225,22.639) 19.373,22.491 ccw(c19.52,22.344) U1.F4@19.312,22.344 ; U1.F4@19.247,22.418 ccw(c19.082,22.704) v2@19.411,22.679 ; U1.F4@19.3,22.365 cw(c19.586,22.2) v2@19.561,22.529 ; 19.34,22.473 ccw(c19.263,22.606) v2@19.414,22.639 ; 19.354,22.459 cw(c19.487,22.382) v2@19.52,22.532 ; v2@19.41,22.669 cw(c19.073,22.669) 19.312,22.43 cw(c19.55,22.192) v2@19.55,22.529
  L4 w0.076: 18.09,22.344 19.225,22.344 v2(19.55,22.669) ; v2@19.385,22.669 cw(c18.986,22.669) 19.268,22.387 cw(c19.55,22.105) v2@19.55,22.504 ; v2@19.461,22.669 cw(c19.246,22.669) 19.398,22.517 cw(c19.55,22.365) v2@19.55,22.58
  L4 w0.127: J2.51@2.365,7.165 2.992,7.792 ; J2.51@2.454,7.482 ccw(c2.454,8.034) 2.844,7.644 ; J2.51@2.644,7.18 cw(c3.173,7.222) 2.798,7.597 ; J2.51@2.77,7.19 cw(c3.533,7.251) 2.992,7.792 ; 18.087,22.34 17.902,22.156 14.29,22.156 6.189,14.055 6.189,8.5 5.48,7.792 2.992,7.792 ; 18.087,22.344 18.09,22.344
F11_BOOT_MODE0: J1.11 U1.F11 | length 30
  Top Layer w0.127: U1.F11@23.775,22.344 v3(24.1,22.669) ; U1.F11@23.775,22.43 ccw(c23.775,22.639) 23.923,22.491 ccw(c24.07,22.344) U1.F11@23.862,22.344 ; v3@23.986,22.669 cw(c23.71,22.669) 23.905,22.473 cw(c24.1,22.278) v3@24.1,22.554
  L3 w0.076: v3(24.1,22.669) 24.425,22.994 24.91,22.994 ; v3@24.1,22.808 ccw(c24.1,23.146) 24.339,22.907 ccw(c24.577,22.669) v3@24.24,22.669
  L3 w0.127: 24.91,22.994 25.075,22.994 25.171,22.897 31.713,22.897 37.338,17.272 37.338,10.375 38.671,9.042 40.028,9.042 ; 40.156,8.914 ccw(c40.546,9.304) J1.11@40.546,8.753 ; 40.216,8.854 cw(c39.87,8.508) J1.11@40.357,8.455 ; J1.11@40.23,8.469 ccw(c39.531,8.544) 40.028,9.042 ; J1.11@40.635,8.435 40.028,9.042
F12_SWD_CLK: J1.12 U1.F12 | length 30.2
  Top Layer w0.127: U1.F12@24.425,22.344 v3(24.75,22.669) ; U1.F12@24.425,22.43 ccw(c24.425,22.639) 24.573,22.491 ccw(c24.72,22.344) U1.F12@24.512,22.344 ; v3@24.636,22.669 cw(c24.36,22.669) 24.555,22.473 cw(c24.75,22.278) v3@24.75,22.554
  L3 w0.127: v3(24.75,22.669) 24.94,22.479 ; v3@24.752,22.554 cw(c24.758,22.297) 24.94,22.479 ; v3@24.864,22.666 ccw(c25.122,22.661) 24.94,22.479 ; J1.12@39.365,8.435 38.354,8.435 36.83,9.959 36.83,17.189 31.54,22.479 24.94,22.479 ; 38.51,8.435 cw(c38.51,7.668) 39.052,8.21 ccw(c38.51,7.668) 38.51,8.435 ; 38.51,8.435 ccw(c38.51,9.202) 39.052,8.66 cw(c38.51,9.202) 38.51,8.435 ; 38.816,8.435 cw(c38.816,7.975) 39.141,8.3 ccw(c38.816,7.975) 38.816,8.435 ; 38.816,8.435 ccw(c38.816,8.895) 39.141,8.57 cw(c38.816,8.895) 38.816,8.435
F13: J1.30 R21.2 U1.F13 | length 19.4
  Top Layer w0.127: U1.F13@25.075,22.344 25.4,22.669 26.162,22.669 26.289,22.796 R21.2@27.821,22.796 28.273,22.344 35.169,22.344 37.647,19.865 J1.30@39.365,19.865 ; U1.F13@25.075,22.43 ccw(c25.075,22.639) 25.223,22.491 ccw(c25.37,22.344) U1.F13@25.162,22.344 ; R21.2@27.689,22.664 ccw(c27.371,22.345) 27.371,22.796 ccw(c27.371,23.246) R21.2@27.689,22.927 ; R21.2@27.821,22.609 cw(c27.821,22.159) 28.139,22.477 cw(c28.458,22.796) R21.2@28.008,22.796 ; J1.30@39.052,19.64 ccw(c38.51,19.098) 38.51,19.865 ccw(c38.51,20.632) J1.30@39.052,20.09 ; J1.30@39.141,19.73 ccw(c38.816,19.405) 38.816,19.865 ccw(c38.816,20.325) J1.30@39.141,20
F14: J1.27 U1.F14 | length 18.4
  Top Layer w0.127: U1.F14@25.725,22.344 26.5,22.344 26.825,22.019 34.793,22.019 37.583,19.228 40.002,19.228 ; U1.F14@25.786,22.282 cw(c25.934,22.135) 25.934,22.344 cw(c25.934,22.552) U1.F14@25.786,22.405 ; 40.156,19.074 ccw(c40.546,19.464) J1.27@40.546,18.913 ; 40.199,19.031 cw(c39.815,18.648) J1.27@40.356,18.609 ; J1.27@40.229,18.618 ccw(c39.449,18.674) 40.002,19.228 ; J1.27@40.635,18.595 40.002,19.228
FLASH_VCC: C52.2 C53.2 R25.2 R26.1 R27.1 R28.1 U3.8 | length 23.2
  L4 w0.508: v1(11.214,8.153) 12.002,7.366 16.9,7.366 16.916,7.382 20.897,7.382 v1(22.31,5.969)
  Bottom Layer w0.508: C53.2@5.817,9.863 5.817,8.575 R26.1@5.829,8.562 ; C53.2@5.918,9.863 C52.2@6.883,9.863 R25.2@7.925,9.863 ; R25.2@7.899,9.889 R25.2@7.925,9.863 ; v1(11.214,8.153) 10.757,8.611 U3.8@9.665,8.611 9.177,8.611 R25.2@7.925,9.863 ; R28.1@20.744,8.658 21.502,7.9 R27.1@21.502,5.97 v1@22.309,5.97
FLEXSPI_CLK: R34.1 U1.L4 | length 27.4
  Top Layer w0.127: v2@18.889,18.908 ccw(c18.864,19.237) U1.L4@19.15,19.072 ; v2(18.9,18.769) U1.L4@19.225,19.094 ; v2@18.9,18.908 ccw(c18.9,19.246) 19.138,19.007 ccw(c19.377,18.769) v2@19.04,18.769 ; v2@18.93,18.905 ccw(c18.963,19.055) 19.096,18.978 ; v2@19.036,18.799 cw(c19.187,18.831) 19.11,18.965 ; v2@19.039,18.758 cw(c19.368,18.733) U1.L4@19.203,19.019 ; U1.L4@19.139,19.094 cw(c18.93,19.094) 19.077,18.946 cw(c19.225,18.798) U1.L4@19.225,19.007
  L3 w0.076: 18.09,19.101 18.567,19.101 v2(18.9,18.769) ; v2@18.735,18.769 ccw(c18.336,18.769) 18.618,19.05 ccw(c18.9,19.332) v2@18.9,18.934 ; v2@18.811,18.769 ccw(c18.596,18.769) 18.748,18.92 ccw(c18.9,19.072) v2@18.9,18.857
  L3 w0.127: v1@6.02,6.51 ccw(c5.695,6.835) 6.155,6.835 ccw(c6.615,6.835) v1@6.29,6.51 ; v1(6.155,6.375) 6.155,10.067 15.138,19.05 18.046,19.05 18.09,19.094
  Bottom Layer w0.127: v1@6.155,6.185 cw(c6.155,5.706) R34.1@6.494,6.045 ; v1@6.163,6.185 cw(c6.172,5.947) R34.1@6.379,6.066 ; v1@6.163,6.375 R34.1@6.57,5.969 ; v1@6.21,6.193 cw(c6.303,5.879) 6.467,6.163 cw(c6.589,6.373) 6.346,6.374 ccw(c6.786,6.375) R34.1@6.475,6.064 ; v1@6.339,6.326 ccw(c6.654,6.242) R34.1@6.372,6.079 ; R34.1@6.383,5.969 ccw(c5.933,5.969) 6.251,6.287 ccw(c6.57,6.606) R34.1@6.57,6.156
FLEXSPI_D0_A: R29.2 U1.P3 | length 24.2
  Top Layer w0.127: v1(14.529,6.075) 15.773,7.32 15.773,14.342 U1.P3@18.575,17.144 ; v1@14.529,6.266 ccw(c14.529,6.725) 14.854,6.4 ccw(c15.179,6.075) v1@14.719,6.075
  Bottom Layer w0.127: R29.2@6.449,4.666 cw(c6.229,4.406) 6.57,4.406 ; R29.2@6.57,4.809 6.57,4.406 ; R29.2@6.69,4.666 ccw(c6.91,4.406) 6.57,4.406 ; v1@14.338,6.075 cw(c13.878,6.075) 14.204,5.75 cw(c14.529,5.425) v1@14.529,5.885 ; v1(14.529,6.075) 12.391,3.937 7.039,3.937 6.57,4.406
FLEXSPI_D1_A: R31.2 U1.N4 | length 18.2
  Top Layer w0.127: 16.292,8.374 cw(c15.919,8.001) v1@16.446,8.001 ; 16.36,8.306 ccw(c16.637,8.583) v1@16.637,8.192 ; v1@16.665,8.001 16.154,8.512 16.154,14.148 18.9,16.893 18.9,17.469 U1.N4@19.225,17.794 ; U1.N4@19.139,17.794 cw(c18.93,17.794) 19.077,17.646 cw(c19.225,17.498) U1.N4@19.225,17.707
  Bottom Layer w0.127: v1(16.637,8.001) 16.658,7.98 20.039,7.98 R31.2@20.744,7.275 ; v1@16.772,7.866 cw(c17.046,7.592) 17.046,7.98 ; v1@16.772,8.136 ccw(c17.147,8.511) 17.147,7.98 ; R31.2@20.557,7.275 ccw(c20.107,7.275) 20.425,7.594 ccw(c20.744,7.912) R31.2@20.744,7.462
FLEXSPI_D2_A: R32.2 U1.P4 | length 18.6
  Top Layer w0.127: U1.P4@19.164,17.082 cw(c19.016,16.935) 19.225,16.935 cw(c19.434,16.935) U1.P4@19.286,17.082 ; U1.P4@19.225,17.144 19.225,16.743 16.501,14.02 16.501,9.429 18.085,7.845 18.085,5.588 v1(19.71,3.962) ; v1@19.52,3.962 ccw(c19.06,3.962) 19.385,4.288 ccw(c19.71,4.613) v1@19.71,4.153
  Bottom Layer w0.127: v1@19.576,4.097 ccw(c19.004,4.669) R32.2@19.813,4.669 ; v1@19.665,4.007 ccw(c19.31,4.363) 19.813,4.363 ; v1(19.71,3.962) 19.813,4.065 R32.2@19.813,4.765
FLEXSPI_D3_A: R33.2 U1.P5 | length 27.2
  Top Layer w0.127: v1@18.458,6.84 ccw(c18.158,7.141) 18.582,7.141 ; 18.582,7.19 ccw(c19.078,7.19) v1@18.728,6.84 ; v1(18.593,6.706) 18.582,6.716 18.582,7.876 16.84,9.619 16.84,13.868 19.875,16.903 U1.P5@19.875,17.144 ; U1.P5@19.814,17.082 cw(c19.666,16.935) 19.875,16.935 cw(c20.084,16.935) U1.P5@19.936,17.082
  Bottom Layer w0.127: R33.2@6.57,7.16 cw(c6.57,6.709) 6.888,7.028 cw(c7.206,7.346) R33.2@6.756,7.346 ; R33.2@6.57,7.346 7.22,6.696 18.583,6.696 v1(18.593,6.706) ; 18.11,6.696 ccw(c18.11,7.189) v1@18.458,6.84 ; 18.156,6.696 cw(c18.156,6.269) v1@18.458,6.571
FLEXSPI_SS0: R30.1 U1.L3 | length 16.7
  Top Layer w0.127: v3(18.25,18.769) U1.L3@18.575,19.094 ; v3@18.25,18.883 ccw(c18.25,19.159) 18.445,18.964 ccw(c18.64,18.769) v3@18.364,18.769 ; U1.L3@18.489,19.094 cw(c18.28,19.094) 18.427,18.946 cw(c18.575,18.798) U1.L3@18.575,19.007
  L3 w0.127: v1@16.248,15.756 ccw(c15.923,16.081) 16.383,16.081 ccw(c16.843,16.081) v1@16.518,15.756 ; v1(16.383,15.621) 16.383,17.552 17.6,18.769 v3(18.25,18.769) ; v3@18.169,18.688 ccw(c17.974,18.493) 17.974,18.769 ccw(c17.974,19.045) v3@18.169,18.849
  Bottom Layer w0.127: v1@16.383,15.431 cw(c16.383,14.971) 16.708,15.296 cw(c17.033,15.621) v1@16.573,15.621 ; v1(16.383,15.621) 17.475,14.529 18.872,14.529 20.744,12.657 20.744,11.26 R30.1@20.744,9.66 ; R30.1@20.612,9.792 ccw(c20.294,10.11) 20.744,10.11 ccw(c21.194,10.11) R30.1@20.876,9.792
G1: J2.39 U1.G1 | length 19.6
  Top Layer w0.127: J2.39@2.365,14.785 2.965,15.385 ; J2.39@2.454,15.102 ccw(c2.454,15.654) 2.844,15.264 ; J2.39@2.643,14.807 cw(c3.117,14.862) 2.78,15.199 ; J2.39@2.769,14.821 cw(c3.45,14.9) 2.965,15.385 ; U1.G1@17.214,21.632 ccw(c17.066,21.485) 17.066,21.694 ccw(c17.066,21.902) U1.G1@17.214,21.755 ; U1.G1@17.275,21.694 11.032,21.694 4.723,15.385 2.965,15.385
G2: J2.38 U1.G2 | length 19.1
  Top Layer w0.127: J2.38@3.635,16.055 4.689,16.055 10.653,22.019 17.6,22.019 U1.G2@17.925,21.694 ; J2.38@3.859,15.92 cw(c4.184,15.595) 4.184,16.055 cw(c4.184,16.515) J2.38@3.859,16.189 ; J2.38@3.948,15.83 cw(c4.49,15.288) 4.49,16.055 cw(c4.49,16.821) J2.38@3.948,16.279 ; U1.G2@17.839,21.694 ccw(c17.63,21.694) 17.777,21.841 ccw(c17.925,21.989) U1.G2@17.925,21.78
G3: J2.52 U1.G3 | length 27.5
  Top Layer w0.127: v3@18.25,21.904 cw(c18.25,21.628) 18.445,21.823 cw(c18.64,22.019) v3@18.364,22.019 ; v3(18.25,22.019) U1.G3@18.575,21.694 ; U1.G3@18.489,21.694 ccw(c18.28,21.694) 18.427,21.841 ccw(c18.575,21.989) U1.G3@18.575,21.78
  L4 w0.127: J2.52@3.635,7.165 5.514,7.165 7.239,8.89 7.239,14.326 14.427,21.514 17.745,21.514 v3(18.25,22.019) ; J2.52@3.859,7.03 cw(c4.184,6.705) 4.184,7.165 cw(c4.184,7.625) J2.52@3.859,7.299 ; J2.52@3.948,6.94 cw(c4.49,6.398) 4.49,7.165 cw(c4.49,7.931) J2.52@3.948,7.389 ; v3@18.136,22.019 cw(c17.86,22.019) 18.055,21.823 cw(c18.25,21.628) v3@18.25,21.904
G4: J2.53 U1.G4 | length 28.7
  Top Layer w0.127: v3@18.9,21.904 cw(c18.9,21.628) 19.095,21.823 cw(c19.29,22.019) v3@19.014,22.019 ; v3(18.9,22.019) U1.G4@19.225,21.694 ; U1.G4@19.139,21.694 ccw(c18.93,21.694) 19.077,21.841 ccw(c19.225,21.989) U1.G4@19.225,21.78
  L4 w0.127: J2.53@2.365,5.895 2.992,6.522 ; J2.53@2.454,6.212 ccw(c2.454,6.764) 2.844,6.374 ; J2.53@2.644,5.91 cw(c3.173,5.952) 2.798,6.327 ; J2.53@2.77,5.92 cw(c3.533,5.981) 2.992,6.522 ; v3@18.786,22.019 cw(c18.51,22.019) 18.705,21.823 cw(c18.9,21.628) v3@18.9,21.904 ; v3(18.9,22.019) 17.938,21.057 16.129,21.057 7.569,12.497 7.569,8.585 5.506,6.522 2.992,6.522
G5_SAI2_TX_SYNC: J2.21 U1.G5 | length 24.2
  Top Layer w0.127: v2@19.539,21.879 cw(c19.514,21.55) U1.G5@19.8,21.715 ; v2@19.55,21.879 cw(c19.55,21.542) 19.788,21.78 cw(c20.027,22.019) v2@19.69,22.019 ; v2(19.55,22.019) U1.G5@19.875,21.694 ; v2@19.58,21.882 cw(c19.613,21.732) 19.746,21.809 ; v2@19.686,21.989 ccw(c19.837,21.956) 19.76,21.823 ; v2@19.689,22.029 ccw(c20.018,22.054) U1.G5@19.853,21.768 ; U1.G5@19.789,21.694 ccw(c19.58,21.694) 19.727,21.841 ccw(c19.875,21.989) U1.G5@19.875,21.78
  L3 w0.127: J2.21@2.365,26.215 3,26.85 ; J2.21@2.454,26.532 ccw(c2.454,27.084) 2.844,26.694 ; J2.21@2.644,26.228 cw(c3.19,26.266) 2.803,26.652 ; J2.21@2.771,26.237 cw(c3.558,26.291) 3,26.85 ; v2@19.41,22.019 cw(c19.073,22.019) 19.312,21.78 cw(c19.55,21.542) v2@19.55,21.879 ; v2(19.55,22.019) 19.182,21.65 18.101,21.65 17.907,21.844 11.45,21.844 6.444,26.85 3,26.85
G10: J1.33 U1.G10 | length 22.5
  Top Layer w0.127: U1.G10@23.125,21.694 v2(23.45,22.019) ; U1.G10@23.125,21.78 ccw(c23.125,21.989) 23.273,21.841 ccw(c23.42,21.694) U1.G10@23.212,21.694 ; U1.G10@23.147,21.768 ccw(c22.982,22.054) v2@23.311,22.029 ; U1.G10@23.2,21.715 cw(c23.486,21.55) v2@23.461,21.879 ; 23.24,21.823 ccw(c23.163,21.956) v2@23.314,21.989 ; 23.254,21.809 cw(c23.387,21.732) v2@23.42,21.882 ; v2@23.31,22.019 cw(c22.973,22.019) 23.212,21.78 cw(c23.45,21.542) v2@23.45,21.879
  L4 w0.127: v2@23.45,21.879 cw(c23.45,21.542) 23.689,21.78 cw(c23.927,22.019) v2@23.59,22.019 ; v2(23.45,22.019) 23.855,21.614 25.146,21.614 25.3,21.768 39.899,21.768 40.537,22.405 J1.33@40.635,22.405 ; 39.988,21.856 cw(c40.546,21.298) J1.33@40.546,22.088 ; 40.011,21.879 ccw(c39.485,22.405) J1.33@40.229,22.405 ; 40.205,22.073 cw(c40.546,21.732) J1.33@40.546,22.215 ; 40.228,22.096 ccw(c39.919,22.405) J1.33@40.356,22.405
G11_CAN2_RXD: J1.10 U1.G11 | length 30.4
  Top Layer w0.127: U1.G11@23.775,21.694 v2(24.1,22.019) ; U1.G11@23.775,21.78 ccw(c23.775,21.989) 23.923,21.841 ccw(c24.07,21.694) U1.G11@23.862,21.694 ; U1.G11@23.797,21.768 ccw(c23.632,22.054) v2@23.961,22.029 ; U1.G11@23.85,21.715 cw(c24.136,21.55) v2@24.111,21.879 ; 23.89,21.823 ccw(c23.813,21.956) v2@23.964,21.989 ; 23.904,21.809 cw(c24.037,21.732) v2@24.07,21.882 ; v2@23.96,22.019 cw(c23.623,22.019) 23.862,21.78 cw(c24.1,21.542) v2@24.1,21.879
  L3 w0.127: v2@24.1,21.879 cw(c24.1,21.542) 24.339,21.78 cw(c24.577,22.019) v2@24.24,22.019 ; v2(24.1,22.019) 24.468,21.65 30.981,21.65 ; 30.981,21.614 31.017,21.614 35.814,16.817 35.814,9.728 38.377,7.165 J1.10@39.365,7.165 ; J1.10@39.052,6.94 ccw(c38.51,6.398) 38.51,7.165 ccw(c38.51,7.932) J1.10@39.052,7.39 ; J1.10@39.141,7.03 ccw(c38.816,6.705) 38.816,7.165 ccw(c38.816,7.625) J1.10@39.141,7.3
G12_SAI1_TX_BLCK: J1.9 U1.G12 | length 30.6
  Top Layer w0.127: U1.G12@24.425,21.694 v2(24.75,22.019) ; U1.G12@24.425,21.78 ccw(c24.425,21.989) 24.573,21.841 ccw(c24.72,21.694) U1.G12@24.512,21.694 ; U1.G12@24.447,21.768 ccw(c24.282,22.054) v2@24.611,22.029 ; U1.G12@24.5,21.715 cw(c24.786,21.55) v2@24.761,21.879 ; 24.54,21.823 ccw(c24.463,21.956) v2@24.614,21.989 ; 24.554,21.809 cw(c24.687,21.732) v2@24.72,21.882 ; v2@24.61,22.019 cw(c24.273,22.019) 24.512,21.78 cw(c24.75,21.542) v2@24.75,21.879
  L3 w0.127: v2(24.75,22.019) 31.321,22.019 36.246,17.094 36.246,9.881 38.355,7.772 40.028,7.772 ; v2@24.849,21.92 cw(c25.087,21.681) 25.087,22.019 cw(c25.087,22.356) v2@24.849,22.117 ; 40.156,7.644 ccw(c40.546,8.034) J1.9@40.546,7.483 ; 40.216,7.584 cw(c39.87,7.238) J1.9@40.357,7.185 ; J1.9@40.23,7.199 ccw(c39.531,7.274) 40.028,7.772 ; J1.9@40.635,7.165 40.028,7.772
G13: J1.23 U1.G13 | length 20.1
  Top Layer w0.127: U1.G13@25.075,21.694 25.4,22.019 26.289,22.019 26.675,21.633 33.688,21.633 38.633,16.688 40.002,16.688 ; U1.G13@25.075,21.78 ccw(c25.075,21.989) 25.223,21.841 ccw(c25.37,21.694) U1.G13@25.162,21.694 ; 40.156,16.534 ccw(c40.546,16.924) J1.23@40.546,16.373 ; 40.199,16.491 cw(c39.815,16.108) J1.23@40.356,16.069 ; J1.23@40.229,16.078 ccw(c39.449,16.134) 40.002,16.688 ; J1.23@40.635,16.055 40.002,16.688
G14_BOOT_MODE1: J1.24 U1.G14 | length 18.7
  Top Layer w0.127: U1.G14@25.725,21.607 cw(c25.725,21.398) 25.873,21.546 cw(c26.02,21.694) U1.G14@25.812,21.694 ; U1.G14@25.725,21.694 26.05,21.369 33.165,21.369 38.479,16.055 J1.24@39.365,16.055 ; J1.24@38.982,15.935 ccw(c38.804,15.863) 38.804,16.055 ccw(c38.804,16.247) J1.24@38.982,16.175 ; J1.24@39.052,15.83 ccw(c38.51,15.288) 38.51,16.055 ccw(c38.51,16.822) J1.24@39.052,16.28 ; J1.24@39.141,15.92 ccw(c38.816,15.595) 38.816,16.055 ccw(c38.816,16.515) J1.24@39.141,16.19
GND: C1.2 C2.2 C3.2 C4.2 C5.2 C6.2 C7.2 C8.2 C9.2 C10.2 C11.2 C12.1 C13.1 C14.1 C15.2 C16.1 C17.2 C18.1 C19.2 C20.1 C21.2 C22.1 C23.1 C24.1 C25.2 C26.2 C27.2 C28.2 C29.1 C30.2 C31.1 C32.1 C33.1 C34.1 C35.2 C36.1 C37.1 C38.1 C39.1 C40.1 C41.1 C42.1 C43.1 C44.1 C45.1 C46.1 C47.1 C48.1 C49.1 C50.1 C51.1 C52.1 C53.1 C60.2 J1.1 J1.2 J1.59 J1.60 J2.1 J2.2 J2.59 J2.60 J3.1 J3.18 J3.25 LED1.2 LED2.2 R17.1 R21.1 R35.1 R36.2 U1.A1 U1.A14 U1.B5 U1.B10 U1.E2 U1.E13 U1.G7 U1.G8 U1.H7 U1.H8 U1.J7 U1.J8 U1.K2 U1.K6 U1.K9 U1.K13 U1.L9 U1.N1 U1.N2 U1.N5 U1.N8 U1.P1 U1.P14 U2.1 U3.4 Y1.2 | length 106.2
  Top Layer w0.203: v2(16.95,16.819) U1.P1@17.275,17.144 ; v2@16.95,16.92 ccw(c16.95,17.165) 17.123,16.992 ccw(c17.297,16.819) v2@17.052,16.819 ; v2(16.95,17.469) U1.N1@17.275,17.794 ; v2@16.95,17.57 ccw(c16.95,17.815) 17.123,17.642 ccw(c17.297,17.469) v2@17.052,17.469 ; v2@16.95,25.817 cw(c16.95,25.572) 17.123,25.745 cw(c17.297,25.919) v2@17.052,25.919 ; v2(16.95,25.919) U1.A1@17.275,25.594 ; v2(17.6,17.469) U1.N2@17.925,17.794 ; v2@17.6,17.57 ccw(c17.6,17.815) 17.773,17.642 ccw(c17.947,17.469) v2@17.702,17.469 ; v2(17.6,19.419) U1.K2@17.925,19.744 ; v2@17.6,19.52 ccw(c17.6,19.765) 17.773,19.592 ccw(c17.947,19.419) v2@17.702,19.419 ; v3@17.6,23.242 cw(c17.6,23.058) 17.73,23.189 cw(c17.86,23.319) v3@17.676,23.319 ; v3(17.6,23.319) U1.E2@17.925,22.994 ; v2(19.55,17.469) U1.N5@19.875,17.794 ; v2@19.55,17.57 ccw(c19.55,17.815) 19.723,17.642 ccw(c19.897,17.469) v2@19.652,17.469 ; v2@19.55,25.167 cw(c19.55,24.922) 19.723,25.095 cw(c19.897,25.269) v2@19.652,25.269 ; v2(19.55,25.269) U1.B5@19.875,24.944 ; v2(20.2,19.419) U1.K6@20.525,19.744 ; v2@20.2,19.52 ccw(c20.2,19.765) 20.373,19.592 ccw(c20.547,19.419) v2@20.302,19.419 ; v2(20.85,20.069) U1.J7@21.175,20.394 ; v2@20.85,20.17 ccw(c20.85,20.415) 21.023,20.242 ccw(c21.197,20.069) v2@20.952,20.069 ; U1.G7@21.175,21.694 U1.H7@21.175,21.044 v2(21.5,20.719) U1.H8@21.825,21.044 ; v2@21.398,20.719 ccw(c21.153,20.719) 21.327,20.892 ccw(c21.5,21.065) 21.5,20.82 ccw(c21.5,21.065) 21.673,20.892 ccw(c21.847,20.719) v2@21.602,20.719 ; U1.N8@21.825,17.794 v2(22.15,17.469) ; U1.J8@21.825,20.394 v2(22.15,20.719) ; U1.G8@21.825,21.694 v2(22.15,22.019) ; v2@22.048,17.469 ccw(c21.803,17.469) 21.977,17.642 ccw(c22.15,17.815) v2@22.15,17.57 ; v2@22.048,20.719 cw(c21.803,20.719) 21.977,20.545 cw(c22.15,20.372) v2@22.15,20.617 ; v2@22.048,22.019 cw(c21.803,22.019) 21.977,21.845 cw(c22.15,21.672) v2@22.15,21.917 ; U1.L9@22.475,19.094 v2(22.8,18.769) ; U1.K9@22.475,19.744 v2(22.8,19.419) ; v2@22.698,18.769 ccw(c22.453,18.769) 22.627,18.942 ccw(c22.8,19.115) v2@22.8,18.87 ; v2@22.698,19.419 ccw(c22.453,19.419) 22.627,19.592 ccw(c22.8,19.765) v2@22.8,19.52 ; U1.B10@23.125,24.944 v2(23.45,25.269) ; v2@23.348,25.269 cw(c23.103,25.269) 23.277,25.095 cw(c23.45,24.922) v2@23.45,25.167 ; U1.K13@25.075,19.744 v2(25.4,19.419) ; U1.E13@25.075,22.994 v2(25.4,23.319) ; v2@25.298,19.419 ccw(c25.053,19.419) 25.227,19.592 ccw(c25.4,19.765) v2@25.4,19.52 ; v2@25.298,23.319 cw(c25.053,23.319) 25.227,23.145 cw(c25.4,22.972) v2@25.4,23.217 ; U1.P14@25.725,17.144 v2(26.05,16.819) ; U1.A14@25.725,25.594 v2(26.05,25.919) ; v2@25.948,16.819 ccw(c25.703,16.819) 25.877,16.992 ccw(c26.05,17.165) v2@26.05,16.92 ; v2@25.948,25.919 cw(c25.703,25.919) 25.877,25.745 cw(c26.05,25.572) v2@26.05,25.817
  Top Layer w0.254: R36.2@32.156,8.817 32.687,9.347 33.884,9.347 ; C60.2@34.239,8.817 34.239,8.992 33.884,9.347 ; 34.239,9.322 34.214,9.347 33.884,9.347 ; 34.239,9.703 33.884,9.347
  Top Layer w0.381: C34.1@20.079,12.878 20.079,10.963 20.882,10.16 23.857,10.16 24.6,10.903 C33.1@24.6,12.878 ; C43.1@20.85,28.718 20.85,29.393 v1(21.048,29.591) ; v1(22.301,9.373) C18.1@23.122,9.373 C19.2@23.122,8.331
  Top Layer w0.508: v1(8.382,3.048) 9.049,3.715 U2.1@9.049,4.081 ; U2.1@8.922,4.208 U2.1@9.049,4.335 ; v1(10.947,9.296) 11.303,8.941 C11.2@11.44,8.941 ; v1(11.049,9.906) 11.436,9.906 C5.2@11.44,9.91 ; v1(11.049,10.922) 11.397,10.922 C7.2@11.44,10.879 ; C23.1@12.272,7.485 v1(12.272,8.16) ; v1(26.264,12.725) 26.797,12.192 26.797,11.303 ; v1@26.797,9.849 v1(26.797,9.779) v1(26.797,7.112) v1(26.797,5.842) 26.797,4.973 v1(27.071,4.699) 29.718,4.699 30.133,5.114 R17.1@30.133,6.096 ; v1(26.965,14.52) 30.634,14.52 31.473,13.682 v1(31.473,12.319) 31.473,11.686 32.815,11.686 33.198,11.303 R35.1@33.198,10.863 33.808,10.863 34.239,10.432 34.239,9.703 34.239,9.322 C60.2@34.239,8.992 ; C32.1@27.476,11.303 26.797,11.303 ; Y1.2@27.933,9.849 26.844,9.849 26.797,9.895 26.797,11.303 ; R21.1@28.821,22.796 v1(32.986,22.796) ; v1@32.893,3.804 LED2.2@32.893,4.694 ; v1(35.306,3.556) 35.37,3.556 36.22,4.406 LED1.2@36.22,4.846
  Bottom Layer w0.381: C30.2@13.076,12.954 C29.1@13.076,13.945 ; v2(13.567,15.304) C29.1@13.567,14.437 ; v1(14.634,15.007) 14.137,15.007 C29.1@13.567,14.437 ; 14.647,13.789 14.215,13.789 C29.1@13.567,14.437 ; v1(14.647,14.437) C29.1@13.567,14.437 ; v1(15.57,16.205) 15.654,16.289 C28.2@16.332,16.289 ; C50.1@15.858,21.387 C48.1@15.858,22.378 C47.1@15.858,23.326 C51.1@15.858,24.274 ; C25.2@17.416,17.983 17.6,17.8 v2(17.6,17.469) ; C27.2@17.416,20.168 17.6,19.984 v2(17.6,19.419) ; v1(17.87,9.601) C44.1@17.87,11.032 C49.1@18.818,11.032 ; v2(20.2,22.669) C6.2@20.684,22.669 ; v2(20.85,20.069) 21.238,20.069 C12.1@21.31,20.141 ; v2(21.5,20.719) 21.531,20.75 C3.2@21.531,21.361 ; C20.1@25.392,16.392 C21.2@25.392,17.415 ; v2@25.392,19.426 C39.1@25.392,20.43 C40.1@26.335,20.43 ; 25.412,16.819 v2(26.05,16.819) 26.443,16.426 C14.1@26.724,16.426 27.203,16.905 v1(27.203,16.954) ; C1.2@26.724,18.519 26.724,18.912 27.076,19.264 27.076,19.279 27.277,19.479 C42.1@27.277,20.43 ; C15.2@27.722,16.426 27.722,16.485 v1(28.128,16.891) ; C2.2@27.722,18.519 27.722,19.213 v1(27.737,19.228) ; C41.1@28.219,20.43 28.219,19.558 v1(28.55,19.228)
  Bottom Layer w0.457: v1(10.033,16.129) 10.295,16.391 C35.2@10.77,16.391
  Bottom Layer w0.508: C53.1@5.817,10.863 C52.1@6.883,10.863 6.693,11.054 v1(6.693,11.786) ; 14.673,13.792 C13.1@15.358,13.792 ; C26.2@15.367,17.05 15.367,16.408 v1(15.57,16.205) ; v1(16.459,4.208) 17.052,4.801 U3.4@17.665,4.801 ; C45.1@18.66,15.928 C46.1@20.155,17.423 ; v2(19.55,17.469) 19.596,17.423 C46.1@20.155,17.423 ; C46.1@20.201,17.423 C46.1@20.155,17.423 ; C16.1@23.123,16.055 C17.2@23.123,15.039 23.247,14.915 v1(23.247,14.478)
  other v1: 1.022,0.786 3.43,0.786 5.838,0.786 8.246,0.786 10.654,0.786 13.062,0.786 15.469,0.786 17.877,0.786 20.285,0.786 22.693,0.786 25.101,0.786 27.509,0.786 29.917,0.786 32.324,0.786 34.732,0.786 37.14,0.786 39.548,0.786 41.956,0.786 41.956,3.231 1.022,3.248 32.893,3.785 22.508,4.085 28.575,4.699 22.835,4.987 41.956,5.676 1.022,5.711 41.956,8.12 1.022,8.173 23.334,10.126 22.022,10.16 41.956,10.565 1.022,10.636 41.956,13.01 1.022,13.098 23.952,14.063 15.312,15.062 41.956,15.455 1.022,15.561 41.956,17.899 1.022,18.023 27.153,19.253 41.956,20.344 1.022,20.485 41.956,22.789 33.842,22.796 34.835,22.796 1.022,22.948 41.956,25.234 1.022,25.41 12.065,26.094 12.675,26.094 13.284,26.094 41.956,27.678 1.022,27.873 11.905,28.524 14.118,28.524 9.973,28.6 19.685,29.591 20.366,29.591 41.956,30.123 19.55,30.179 20.214,30.179 20.879,30.179 1.022,30.335 19.41,30.861 18.593,31.471 17.745,32.181 22.493,32.366 16.832,32.41 41.956,32.568 1.022,32.798 20.98,34.29 41.956,35.013 1.022,35.26 25.248,36.119 17.655,36.144 22.347,36.652 41.956,37.457 1.022,37.723 17.882,37.948 21.597,38.159 27.215,38.481 33.958,39.268 1.022,40.185 3.43,40.185 5.838,40.185 8.246,40.185 10.654,40.185 13.062,40.185 15.469,40.185 17.877,40.185 20.285,40.185 22.693,40.185 25.101,40.185 27.509,40.185 29.917,40.185 32.324,40.185 34.732,40.185 37.14,40.185 39.548,40.185 41.956,40.185
  other v3: 20.2,23.319
H1: J2.41 U1.H1 | length 19.8
  Top Layer w0.127: J2.41@2.365,13.515 2.964,14.113 ; J2.41@2.454,13.832 ccw(c2.454,14.384) 2.844,13.994 ; J2.41@2.643,13.537 cw(c3.114,13.593) 2.779,13.928 ; J2.41@2.769,13.552 cw(c3.444,13.632) 2.964,14.113 ; U1.H1@17.214,20.982 ccw(c17.066,20.835) 17.066,21.044 ccw(c17.066,21.252) U1.H1@17.214,21.105 ; U1.H1@17.275,21.044 11.423,21.044 4.493,14.113 2.964,14.113
H2: J2.42 U1.H2 | length 19.6
  Top Layer w0.127: J2.42@3.635,13.515 4.478,13.515 ; J2.42@3.86,13.381 cw(c4.176,13.072) 4.176,13.515 cw(c4.176,13.957) J2.42@3.86,13.648 ; J2.42@3.951,13.293 cw(c4.478,12.777) 4.478,13.515 ; J2.42@3.951,13.737 ccw(c4.478,14.252) 4.478,13.515 ; U1.H2@17.839,21.044 cw(c17.63,21.044) 17.777,20.896 cw(c17.925,20.748) U1.H2@17.925,20.957 ; U1.H2@17.925,21.044 17.6,20.719 11.682,20.719 4.478,13.515
H3_SAI2_RX_DATA: J2.40 U1.H3 | length 20.1
  Top Layer w0.127: J2.40@3.635,14.785 4.631,14.785 11.215,21.369 18.25,21.369 U1.H3@18.575,21.044 ; J2.40@3.859,14.65 cw(c4.184,14.325) 4.184,14.785 cw(c4.184,15.245) J2.40@3.859,14.919 ; J2.40@3.948,14.56 cw(c4.49,14.018) 4.49,14.785 cw(c4.49,15.551) J2.40@3.948,15.009 ; U1.H3@18.489,21.044 ccw(c18.28,21.044) 18.427,21.191 ccw(c18.575,21.339) U1.H3@18.575,21.13